# Altium PCB polishing_machine.PcbDoc
Units mm, origin at the board's own origin, x right, y up, seen from the top; angles counter-clockwise.
Board outline 82 x 85 mm, 2 copper layers (Top Layer, Bottom Layer); 29 components, 30 nets, 160 pads, 214 vias.
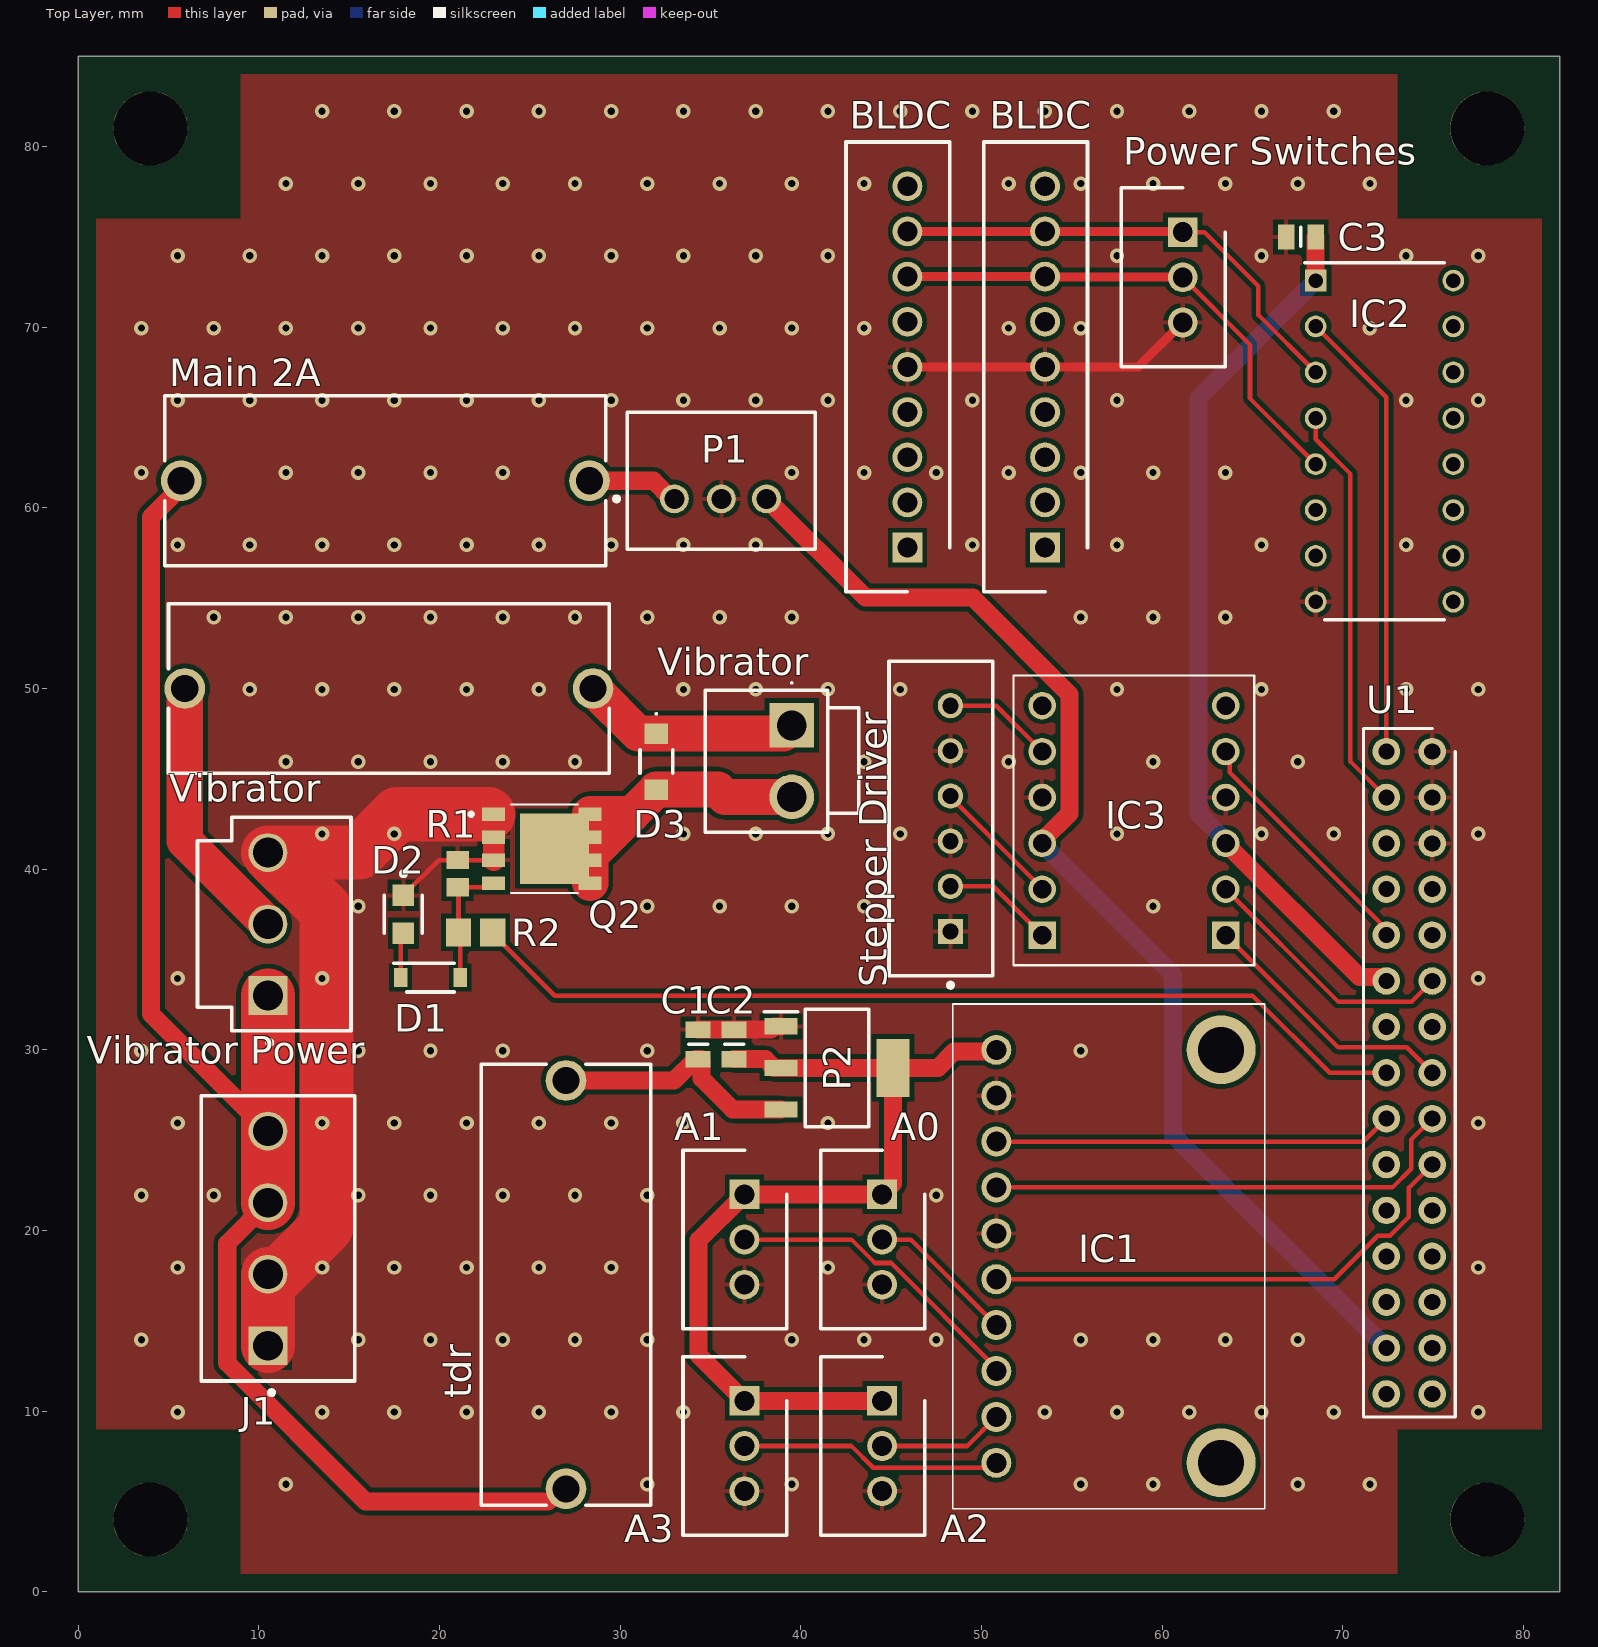
[diagram p0: Top Layer view]
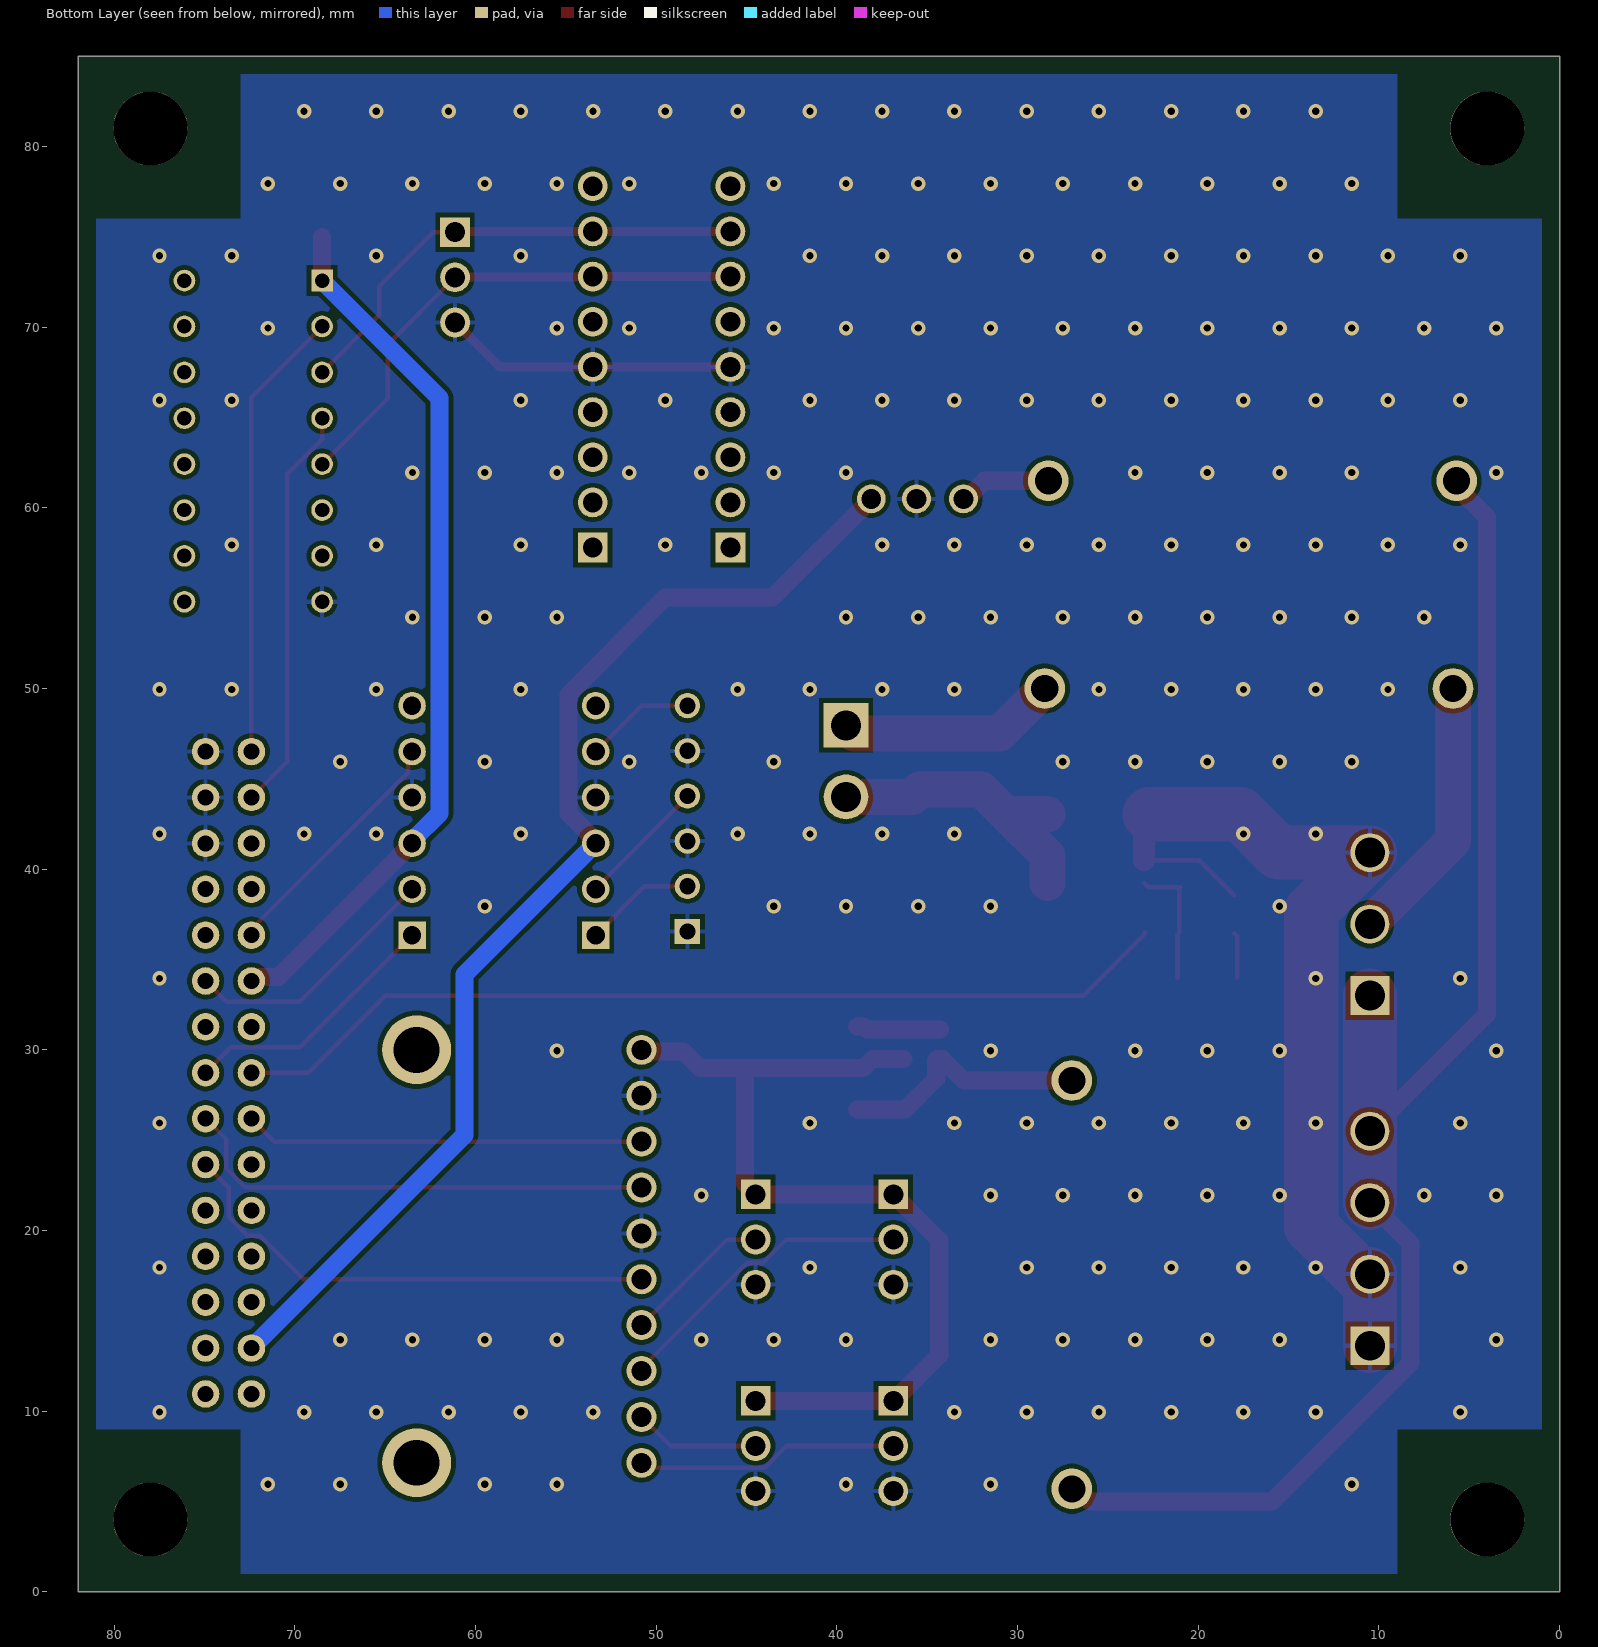
[diagram p1: Bottom Layer view, seen from below]
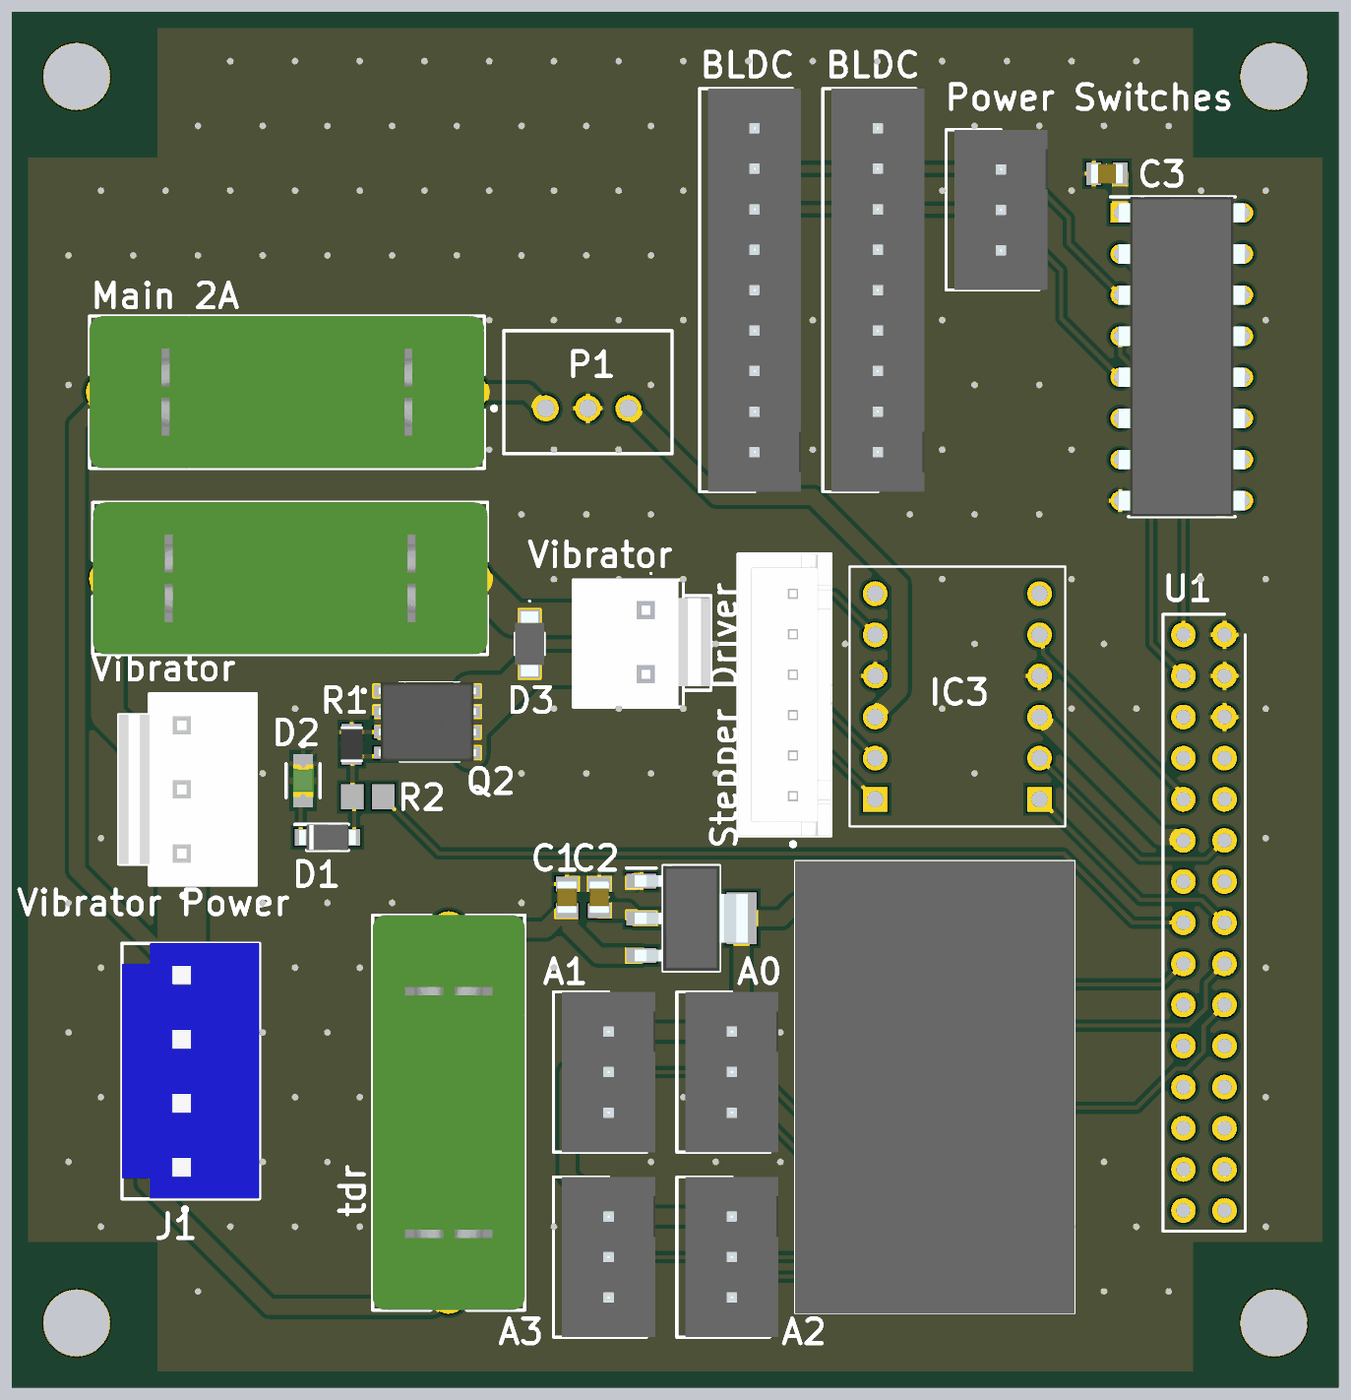
[diagram p2: 3D render of the assembled board from above, using the file's embedded part models]

## Layer stack, top to bottom
Top Solder: solder mask 0.0102, Solder Resist, Dk 3.5
Top Layer: signal copper 0.0356
Dielectric 1: dielectric 0.32, FR-4, Dk 4.8
Bottom Layer: signal copper 0.0356
Bottom Solder: solder mask 0.0102, Solder Resist, Dk 3.5

## Board outline
0,0 82,0 82,85 0,85

## Design rules (kind name [scope] priority, off if disabled: settings)
Clearance Clearance_1 [OnMid vs OnMid] p1: gap=0.25 ignorepadtopadclearanceinfootprint=FALSE sourcerule=44 cellrowname=All cellrowtype=0 cellcolname=All cellcoltype=0 innerlayers=TRUE
Clearance Clearance_2 [(ExistsOnLayer('Top Layer') Or ExistsOnLayer('Bottom Layer')) vs (ExistsOnLayer('Top Layer') Or ExistsOnLayer('Bottom Layer'))] p2: gap=0.25 ignorepadtopadclearanceinfootprint=FALSE sourcerule=44 cellrowname=All cellrowtype=0 cellcolname=All cellcoltype=0 outerlayers=TRUE
Clearance [All] p3: gap=0.254 ignorepadtopadclearanceinfootprint=FALSE ismatrix=TRUE
DiffPairsRouting [All] p1: maxlimit=0.25 minlimit=0.25 mostfreqgap=0.25 toplayer_minwidth=0.381 toplayer_maxwidth=0.381 toplayer_prefwidth=0.381 bottomlayer_minwidth=0.381 bottomlayer_maxwidth=0.381 bottomlayer_prefwidth=0.381 maxuncoupledlength=12.7
HoleSize [All] p1: absolutevalues=TRUE maxlimit=5 minlimit=0.025 maxpercent=80.000 minpercent=20.000
PolygonConnect [All] p1: connectstyle=Relief reliefconductorwidth=0.254 reliefentries=4 polygonreliefangle="90 Angle" airgapwidth=0.254
RoutingVias [All] p1: holewidth=0.711 width=1.27 viastyle="Through Hole" minholewidth=0.711 minwidth=1.27 maxholewidth=0.711 maxwidth=1.27
SolderMaskExpansion [All] p1: expansion=0.102 istentingtop=FALSE
SupplyNets "Schematic Supply Nets_5" [InNet('BLDC_0V')] p1: voltage=0.000
SupplyNets "Schematic Supply Nets_4" [InNet('+5')] p2: voltage=0.000
SupplyNets "Schematic Supply Nets_3" [InNet('+3.3')] p3: voltage=0.000
SupplyNets "Schematic Supply Nets_2" [InNet('+5_A')] p4: voltage=0.000
SupplyNets "Schematic Supply Nets_1" [InNet('+12')] p5: voltage=0.000
Width "Schematic Width Constraint_2" [InNetClass('BLDC')] p1: maxlimit=0.5 minlimit=0.25 preferedwidth=0.5 minimp=50.000000 maximp=50.000000 favimp=50.000000
Width "Schematic Width Constraint_1" [InNetClass('High Current')] p2: maxlimit=20 minlimit=0.25 preferedwidth=3 minimp=50.000000 maximp=50.000000 favimp=50.000000
Width "Schematic Width Constraint" [InNetClass('Power')] p3: maxlimit=1 minlimit=0.25 preferedwidth=1 minimp=50.000000 maximp=50.000000 favimp=50.000000
Width [All] p4: maxlimit=0.25 minlimit=0.25 preferedwidth=0.25 minimp=50.000000 maximp=50.000000 favimp=50.000000
28 further rules are at their usual default settings.

## Classes and differential pairs
net class Power: +3.3 +5 +5_A "Analog Fuse" "Main Fuse"
net class "High Current": +12 BLDC_0V "Vibrator V+" "Vibrator V-" "Vibrator VIN"
net class BLDC: BLDC_FWD BLDC_REV
component class polishing_machinie: A0 A1 A2 A3 BLDC C1 C2 C3 D1 D2 D3 IC1 IC2 IC3 J1 "Main 2A" P1 P2 "Power Switches" Q2 R1 R2 "Stepper Driver" tdr U1 Vibrator "Vibrator Power"

## Components (designator, comment, footprint, x,y, rotation, side; value= is the part's Value field where it differs from the comment)
A0 "B3B-XH-A" SHDR3W64P0X250_1X3_990X575X700P 44.5,22 r90 top
A1 "B3B-XH-A" SHDR3W64P0X250_1X3_990X575X700P 36.88,22 r90 top
A2 "B3B-XH-A" SHDR3W64P0X250_1X3_990X575X700P 44.5,10.57 r90 top
A3 "B3B-XH-A" SHDR3W64P0X250_1X3_990X575X700P 36.88,10.57 r90 top
BLDC "B9B-XH-2-C" SHDR9W64P0X250_1X9_2490X575X700P 45.9,57.8 r90 top (schematic designator "J3 Chuck BLDC")
BLDC "B9B-XH-2-C" SHDR9W64P0X250_1X9_2490X575X700P 53.52,57.8 r90 top (schematic designator "J2 Spindle BLDC")
C1 "10μF" CAPC2012X95N 34.31,30.3 r90 top
C2 "22μF" CAPC2012X95N 36.31,30.3 r90 top
C3 "0.1μF" CAPC2012X70N 67.68,75 r0 top
D1 "S-153T" SODFL3516X70N 19.5,34 r0 top
D2 "LTST-C171GKT" FP-LTST-C171GKT-MFG 18,37.5 r270 top
D3 "DSS110U" DSS110U 32,45.95 r270 top
IC1 "ADS1115" ADS1115 50.82,30 r270 top
IC2 "TC74HC4050AP_F_" DIP762W60P254L1975H445Q16N 72.31,63.69 r0 top
IC3 "BOB-12009" CONV_BOB-12009 58.44,42.7 r180 top
J1 "B4P-VH(LF)(SN)" JST-B4P-VH(LF)(SN)_V 11.95,19.56 r90 top
"Main 2A" "696108003002" 696108003002 17,61.5 r0 top (schematic designator "F1 Main 2A")
P1 "OKI-78SR-5/1.5-W36-C" MURA-OKI-78SR-3 35.6,60.5 r0 top
P2 "AZ1117IH-5.0TRG1" SOT230P700X180-4N 42,29 r0 top
"Power Switches" "B3B-XH-A" SHDR3W64P0X250_1X3_990X575X700P 61.14,75.26 r90 top (schematic designator "J7 Power Switches")
Q2 "AONS66609" AONS66609 25.67,41.135 r0 top
R1 "10k" RESC2013X60X40LL20T25_A 21,39.75 r270 top
R2 "100" RESC2013X60X40ML20T25 22,36.5 r180 top
"Stepper Driver" "B6B-XH-A_LF_SN" FP-B6B-XH-A_LF_SN-MFG 47.755,42.8 r90 top (schematic designator "J6 Stepper Driver")
tdr "696108003002" 696108003002 27,17 r90 top (schematic designator "F1 Sensor 0.2A")
U1 "M5 Core" "M5 Core" 74.95,46.51 r0 top
Vibrator "B2P-VH-B" B2PVHB 39.5,47.96 r270 top (schematic designator "J5 Vibrator")
Vibrator "696108003002" 696108003002 17.2,50 r0 top (schematic designator "F3 Vibrator")
"Vibrator Power" "B3P-VH(LF)(SN)" JST-B3P-VH(LF)(SN)-3_V 11.75,36.96 r90 top (schematic designator "J4 Vibrator Power")

## Footprints (in the part's own frame and the unit in brackets; to place one, negate y for a bottom-side part, rotate by r counter-clockwise, add the part's x,y. Pads: shape width x height; smd on the part's side, far side on the other; paste and mask are expansions set on the pad)
696108003002 [mm] "FUSEHOLDER BLOCKS - PCB - CLIP COVER - THT"
  round 2.25 hole 1.5: 1(-11.3,0) 2(11.3,0)
  silkscreen extent -12.2,-4.7 12.2,4.7, body extent -12.2,-4.7 12.2,4.7, height 11.55
ADS1115 [mm]
  round 1.665 hole 1.11: 1(0,0) 2(2.54,0) 3(5.08,0) 4(7.62,0) 5(10.16,0) 6(12.7,0) 7(15.24,0) 8(17.78,0) 9(20.32,0) 10(22.86,0)
  round 3.81 hole 2.54: MH1(0,12.446) MH2(22.86,12.446)
  silkscreen extent -2.54,-2.41 25.4,14.86, body extent -2.54,-2.41 25.4,14.86, height 3.35
AONS66609 [mm]
  rect 1.27x0.75 smd: 1(-2.67,1.905) 2(-2.67,0.635) 3(-2.67,-0.635) 4(-2.67,-1.905) 5_8(2.67,-1.905) 5_8(2.67,-0.635) 5_8(2.67,0.635) 5_8(2.67,1.905)
  rect 3.81x3.91 smd: 5_8(0.69,0)
  silkscreen extent -4.02,-2.45 2,2.45, body extent -3,-2.45 3,2.45, height 1.1
B2PVHB [mm]
  rect 2.475x2.475 hole 1.65: 1(0,0)
  round 2.475 hole 1.65: 2(3.96,0)
  silkscreen extent -2.4,-4.8 5.91,3.7, body extent -2.02,-4.82 5.83,3.68, height 10.91
CAPC2012X70N [mm]
  rect 0.91x1.39 smd: 1(-0.82,0) 2(0.82,0)
  silkscreen extent 0,-0.53 0,0.53, body extent -1,-0.63 1,0.63, height 0.7
CAPC2012X95N [mm]
  rect 0.91x1.39 smd: 1(-0.82,0) 2(0.82,0)
  silkscreen extent 0,-0.53 0,0.53, body extent -1,-0.63 1,0.63, height 0.95
CONV_BOB-12009 [mil]
  round 60 hole 40: GND_1(200,-50) GND_2(-200,-50) HV(200,50) HV2(200,150) HV3(200,-150) HV4(200,-250) LV(-200,50) LV2(-200,150) LV3(-200,-150) LV4(-200,-250)
  rect 60x60 hole 40: HV1(200,250) LV1(-200,250)
  silkscreen extent -262,-316 262,316, body extent -260,-315 260,315, height 394
DIP762W60P254L1975H445Q16N [mm]
  rect 1.2x1.2 hole 0.8: 1(-3.81,8.89)
  round 1.2 hole 0.8: 2(-3.81,6.35) 3(-3.81,3.81) 4(-3.81,1.27) 5(-3.81,-1.27) 6(-3.81,-3.81) 7(-3.81,-6.35) 8(-3.81,-8.89) 9(3.81,-8.89) 10(3.81,-6.35) 11(3.81,-3.81) 12(3.81,-1.27) 13(3.81,1.27) 14(3.81,3.81) 15(3.81,6.35) 16(3.81,8.89)
  silkscreen extent -4.41,-9.87 3.3,9.87, body extent -3.96,-9.87 3.96,9.87, height 4.45
DSS110U [mm]
  rect 1.15x1.3 smd: 1(-1.55,0) 2(1.55,0)
  silkscreen extent -2.7,-0.9 0.65,0.9, body extent -2.01,-0.9 2.01,0.9, height 1.2
FP-B6B-XH-A_LF_SN-MFG [mm]
  rect 1.4x1.4 hole 0.9 paste-2539.97 mask+0: 1(-6.25,-0.525)
  round 1.4 hole 0.9 paste-2539.97 mask+0: 2(-3.75,-0.525) 3(-1.25,-0.525) 4(1.25,-0.525) 5(3.75,-0.525) 6(6.25,-0.525)
  silkscreen extent -9.35,-2.88 8.7,2.88, body extent -8.8,-2.98 8.8,2.98, height 0.25
FP-LTST-C171GKT-MFG [mm]
  rect 1.2x1.2 smd paste+0 mask+0: 1(-1.05,0) 2(1.05,0)
  silkscreen extent -2.37,-1.05 1.05,1.05, body extent -1.75,-0.77 1.75,0.77, height 0.25
JST-B3P-VH(LF)(SN)-3_V [mm] "Connector, 3-Leads, Body 8.5x11.82mm, Pitch 3.96mm"
  rect 2.15x2.15 hole 1.65: 1(-3.96,1.25)
  round 2.15 hole 1.65: 2(0,1.25) 3(3.96,1.25)
  silkscreen extent -6.68,-3.35 5.91,5.15, body extent -5.91,-3.35 5.91,5.15, height 10.9
JST-B4P-VH(LF)(SN)_V [mm] "CONN, 4-Leads, Body 8.5x15.78mm, Pitch 3.96mm"
  rect 2.15x2.15 hole 1.65: 1(-5.94,1.45)
  round 2.15 hole 1.65: 2(-1.98,1.45) 3(1.98,1.45) 4(5.94,1.45)
  silkscreen extent -8.66,-3.35 7.89,5.15, body extent -7.89,-3.35 7.89,5.15, height 10.9
"M5 Core" [mil]
  round 60 hole 35: 1(0,0) 2(0,-100) 3(0,-200) 4(0,-300) 5(0,-400) 6(0,-500) 7(0,-600) 8(0,-700) 9(0,-800) 10(0,-900) 11(0,-1000) 12(0,-1100) 13(0,-1200) 14(0,-1300) 15(0,-1400) 16(-100,0) 17(-100,-100) 18(-100,-200) 19(-100,-300) 20(-100,-400) 21(-100,-500) 22(-100,-600) 23(-100,-700) 24(-100,-800) 25(-100,-900) 26(-100,-1000) 27(-100,-1100) 28(-100,-1200) 29(-100,-1300) 30(-100,-1400)
  silkscreen extent -150,-1450 50,50, body extent -150,-1450 50,50, height 10
MURA-OKI-78SR-3 [mm] "THMT, 3-Leads, Body 10.4x7.6mm"
  round 1.6 hole 1.1: 1(-2.6,0) 2(0,0) 3(2.5,0)
  silkscreen extent -5.92,-2.8 5.2,4.8, body extent -5.2,-2.8 5.2,4.8, height 16.5
RESC2013X60X40LL20T25_A [mm] "Chip Resistor, 2-Leads, Body 2.20x1.35mm, IPC High Density"
  rect 1x1.25 smd: 1(-0.75,0) 2(0.75,0)
  body extent -1.1,-0.67 1.1,0.67, height 0.6
RESC2013X60X40ML20T25 [mm] "Chip Resistor, 2-Leads, Body 2.00x1.25mm, IPC Low Density"
  rect 1.4x1.55 smd: 1(-0.95,0) 2(0.95,0)
  body extent -1.1,-0.72 1.1,0.72, height 0.6
SHDR3W64P0X250_1X3_990X575X700P [mm]
  rect 1.65x1.65 hole 1.1: 1(0,0)
  round 1.65 hole 1.1: 2(-2.5,0) 3(-5,0)
  silkscreen extent -7.45,-2.35 2.45,3.4, body extent -7.45,-2.88 2.45,2.88, height 7
SHDR9W64P0X250_1X9_2490X575X700P [mm]
  rect 1.65x1.65 hole 1.1: 1(0,0)
  round 1.65 hole 1.1: 2(2.5,0) 3(5,0) 4(7.5,0) 5(10,0) 6(12.5,0) 7(15,0) 8(17.5,0) 9(20,0)
  silkscreen extent -2.45,-2.35 22.45,3.4, body extent -2.45,-2.88 22.45,2.88, height 7
SODFL3516X70N [mm]
  rect 0.74x1.04 smd: 1(-1.65,0) 2(1.65,0)
  silkscreen extent -2.02,-0.8 1.3,0.8, body extent -1.75,-0.8 1.75,0.8, height 0.7
SOT230P700X180-4N [mm]
  rect 1.85x0.9 smd: 1(-3.1,2.3) 2(-3.1,0) 3(-3.1,-2.3)
  rect 1.85x3.2 smd: 4(3.1,0)
  silkscreen extent -4.03,-3.25 1.75,3.25, body extent -3.5,-3.25 3.5,3.25, height 1.8

## Part data
A0 A1 A2 A3 BLDC BLDC "Power Switches" Vibrator: "Connector", Manufacturer_Name="JST (JAPAN SOLDERLESS TERMINALS)"
  A0 A1 A2 A3 "Power Switches": Datasheet Link=http://www.jst-mfg.com/product/pdf/eng/eXH.pdf, Height=7mm, Manufacturer_Part_Number=B3B-XH-A
  BLDC BLDC: Height=7mm, Manufacturer_Part_Number=B9B-XH-2-C
  Vibrator: Datasheet Link=https://www.jst-mfg.com/product/pdf/eng/eVH.pdf, Height=10.9mm, Manufacturer_Part_Number=B2P-VH-B
C1: library part GRM219B31C106KA73D, "Capacitor", Manufacturer_Name="Murata Electronics", Mouser Part Number=N/A, Datasheet Link=http://www.murata.com/~/media/webrenewal/support/library/catalog/products/capacitor/mlcc/c02e.pdf, Height=0.95mm, Manufacturer_Part_Number=GRM219B31C106KA73D, Mouser Price/Stock=https://www.mouser.com/Search/Refine.aspx?Keyword=N%2FA
C2: library part GRM219B31A226MEA0D, "Capacitor", Manufacturer_Name="Murata Electronics", Datasheet Link=http://www.murata.com/~/media/webrenewal/support/library/catalog/products/capacitor/mlcc/c02e.pdf, Height=0.95mm, Manufacturer_Part_Number=GRM219B31A226MEA0D
C3: library part GRM216F51E104ZA01D, "Capacitor", Manufacturer_Name="Murata Electronics", Mouser Part Number=81-GRM40Y104Z25D, Datasheet Link=http://www.murata.com/~/media/webrenewal/support/library/catalog/products/capacitor/mlcc/c02e.pdf, Height=0.7mm, Manufacturer_Part_Number=GRM216F51E104ZA01D, Mouser Price/Stock=https://www.mouser.co.uk/ProductDetail/Murata-Electronics/GRM216F51E104ZA01D?qs=duOfYTBEatk23Zc3Fu%2FfWg%3D%3D
D1: "Diode", Manufacturer_Name=Semitec, Mouser Part Number=954-S-153T, Datasheet Link=https://componentsearchengine.com/Datasheets/1/S-153T.pdf, Height=0.7mm, Manufacturer_Part_Number=S-153T, Mouser Price/Stock=https://www.mouser.co.uk/ProductDetail/Semitec/S-153T?qs=wgO0AD0o1vvtOOXMab9S0Q%3D%3D
D2: library part CMP-22017-000007-1, "LED GREEN CLEAR CHIP SMD", Case Code (Imperial)=0805, Case Code (Metric)=2012, Color=Green, Forward Current=30mA, Forward Voltage=2.1V, Lens Color=Colorless, Max Operating Temperature=85°C, Min Operating Temperature=-55°C, Package Quantity=1, Power Dissipation=100mW, Reverse Voltage=5V, Test Current=10mA, Case/Package=0805, Depth=1.25mm, Dominant Wavelength=569nm, Height=0.8mm, Illumination Color=Green, Lead Free="Lead Free", Length=2mm, Lens Style=Diffused, Lens Transparency=Clear, Luminous Intensity=12mcd, Mount="Surface Mount", Number of Elements=1, Number of LEDs=1, Number of Pins=2, Packaging="Tape and Reel", Power Rating=100mW, Radiation Hardening=No, Viewing Angle=130°, Wavelength=585nm, Width=1.25mm
D3: "Schottky Diode", Manufacturer_Name="SANGDEST MICROELECTRONICS (NANJING) CO LTD", Datasheet Link=https://www.smc-diodes.com/propdf/DSS12U%20THRU%20DSS120U%20N1873%20REV.D.pdf, Height=1.1mm, Manufacturer_Part_Number=DSS110U
IC1: "Integrated Circuit", Manufacturer_Name=Adafruit, Datasheet Link=https://cdn-learn.adafruit.com/downloads/pdf/adafruit-4-channel-adc-breakouts.pdf, Height=3.25mm, Manufacturer_Part_Number=ADS1115
IC2: "Integrated Circuit", Manufacturer_Name=Toshiba, Manufacturer_Part_Number=TC74HC4050AP(F), Mouser Part Number=757-TC74HC4050APF, Datasheet Link=http://toshiba.semicon-storage.com/ap-en/product/logic/cmos-logic/detail.TC74HC4050AP.html, Height=4.45mm, Mouser Price/Stock=https://www.mouser.co.uk/ProductDetail/Toshiba/TC74HC4050APF?qs=6sMpW4eYgwPJdB5%252B3R4%2FxA%3D%3D
IC3: "BSS138 Logic-Level Translator Interface Evaluation Board", Package=None, Availability=Unavailable, MF=SparkFun, MP=BOB-12009, Price=None, SnapEDA_Link=https://www.snapeda.com/parts/BOB-12009/SparkFun%20Electronics/view-part/551764/?ref=snap
J1: library part CMP-2000-05905-1, "Male Header, Pitch 3.96 mm, 1 x 4 Position, Height 10.9 mm, Tail Length 3.7 mm, -25 to 85 degC, RoHS, Bulk", Manufacturer=JST, Package Description="Male Header, Pitch 3.96 mm, 1 x 4 Position, Height 10.9 mm, Tail Length 3.7 mm", Datasheet URL=http://www.jst-mfg.com/product/pdf/eng/eVH.pdf, Datasheet Version=05/2016, Manufacturer URL=http://www.jst.com/home2.html, Mounting Technology=ThroughHole, No of Positions=4, Package Reference=B4P-VH(LF)(SN), Pitch=3.96mm, Style/Orientation=StraightHeader/Plug, Termination=Solder, Type=LockingHeader
"Main 2A" tdr Vibrator: library part CMP-1502-00237-2, Fuse Current=10A, Voltage Rating (AC)=250V, Mount="Through Hole", NexarPartId=56808807, Packaging=Box, REACH SVHC=Unknown, RoHS=Non-Compliant
P1: library part CMP-2000-05274-1, "Non-Isolated DC/DC Converter, 7.5 W, 7 to 36 V, 1.5 A, -40 to 85 degC, 3-Pin THD, RoHS", Current - Output (Max)=1.5A, Manufacturer=Murata, Operating Temperature=-40degC~85degC, Package / Case=3-SIPModule, Power (Watts) - Manufacture Series=8W, Voltage - Input (Max)=36V, Voltage - Input (Min)=7V, Voltage - Isolation=-, Voltage - Output 1=5V, Applications=ITE(Commercial), Category=PowerSupplies-BoardMount, Datasheet URL=https://datasheet.ciiva.com/8006/1790439-8006672.pdf, Datasheet Version=Oct-13, Efficiency=90.5%, Family=DCDCConverters, Features=SCP, Manufacturer URL=http://www.murata.com/, Mounting Type=ThroughHole, Number of Outputs=1, Packaging=Tube, Power (Watts) - Max=8W, Series=Okami™OKI-78SR, Size / Dimension="0.41\"Lx0.30\"Wx0.65\"H(10.4mmx7.6mmx16.5mm)", Type=LinearRegulatorReplacement, Voltage - Output 2=-, Voltage - Output 3=-
P2: "Integrated Circuit", Manufacturer_Name="Diodes Incorporated", Mouser Part Number=621-AZ1117IH-5.0TRG1, Arrow Part Number=AZ1117IH-5.0TRG1, Arrow Price/Stock=https://www.arrow.com/en/products/az1117ih-5.0trg1/diodes-incorporated?utm_currency=USD&region=europe, Datasheet Link=https://www.diodes.com//assets/Datasheets/AZ1117I.pdf, Height=1.8mm, Manufacturer_Part_Number=AZ1117IH-5.0TRG1, Mouser Price/Stock=https://www.mouser.co.uk/ProductDetail/Diodes-Incorporated/AZ1117IH-5.0TRG1?qs=cpo3%2FpBou2jpUVbxjr50ag%3D%3D
Q2: "N-Channel 60 V 10A (Ta), 51A (Tc) 3.1W (Ta), 83W (Tc) Surface Mount 8-PDFN (5.2x5.75)", Package="PDFN56 Taiwan Semiconductor", Check_prices=https://www.snapeda.com/parts/TSM130NB06LCR/Taiwan+Semiconductor/view-part/?ref=eda, MF="Taiwan Semiconductor", MP=TSM130NB06LCR, SnapEDA_Link=https://www.snapeda.com/parts/TSM130NB06LCR/Taiwan+Semiconductor/view-part/?ref=snap
R1: library part CMP-2001-00582-2, "Metal Film Chip Resistor, High Reliability Type, 0.125 W, +/- 0.1%, -55 to 155 degC, 0805 (2012 Metric), RoHS, Tape and Reel", Case Code - in=0805, Case Code - mm=2012, Manufacturer=Panasonic, Operating Temperature Range=-55Cto+155C, Package / Case=0805(2012metric), Package Description="2-Pin Surface Mount Device, Body 2 x 1.25 mm", Power Rating=125mW(1/8W), Resistance=10kOhms, Temperature Coefficient=25PPM/C, Tolerance=0.1%, Voltage Rating=100V, Brand=Panasonic, Datasheet URL=https://industrial.panasonic.com/cdbs/www-data/pdf/RDM0000/AOA0000C307.pdf, Datasheet Version=02/2016, Factory Pack Quantity=5000, Height=0.5mm, Length=2mm, Manufacturer URL=http://www.panasonic.com/, Mounting Technology=SurfaceMount, Package Reference=0805, Packaging=Reel, Product=ThinFilmResistorsSMD, Product Category=ThinFilmResistors-SMD, RoHS=Details, Series=ERA-6A, Termination Style=SMD/SMT, Type=MetalFilmChipResistors, Width=1.25mm
R2: library part CMP-2001-00580-1, Manufacturer=Panasonic, Part Number=ERA6AEB101V
"Vibrator Power": library part CMP-1755-00003-1, "Male Header, Pitch 3.96 mm, 1 x 3 Position, Height 10.9 mm, Tail Length 3.7 mm, -25 to 85 degC, RoHS, Bulk", ComponentLink1Description="Manufacturer URL", ComponentLink1URL=http://www.jst.com/home2.html, ComponentLink2Description=Datasheet, ComponentLink2URL=http://www.jst-mfg.com/product/pdf/eng/eVH.pdf, DatasheetVersion=May-16, PackageDescription="Male Header, Pitch 3.96 mm, 1 x 3 Position, Height 10.9 mm, Tail Length 3.7 mm", PackageReference=B3P-VH(LF)(SN)

## Free pads (board coordinates)
  round 4.1 hole 4.1: ""(4,4) ""(4,81) ""(78,4) ""(78,81)

## Via types
v1: diameter 0.8, hole 0.4, Top Layer to Bottom Layer, tented both sides, 214 vias

## Nets (pads, with @x,y where several pads share a name; then routed paths per layer and width w, separated by ;. In a path a pad name is that pad's centre, name@x,y a point inside that pad or via, vN(x,y) a via of type N, cw(c..) or ccw(c..) an arc to the next point about the centre after c; other vN are vias at no path point)
+3.3: C3.2 IC2.1 IC3.LV U1.21 | length 48.9
  Top Layer w1: IC3.LV 70.928,34.022 72.198,34.022 U1.21 ; IC2.1 C3.2
  Bottom Layer w1: IC3.LV 63.52,41.572 62.008,43.084 62.008,66.088 IC2.1
+5: IC3.HV P1.3 U1.29 | length 66
  Top Layer w1: P1.3 43.569,55.031 49.518,55.031 54.872,49.676 54.872,43.084 53.36,41.572 IC3.HV
  Bottom Layer w1: IC3.HV 60.611,34.179 60.611,25.289 U1.29
+5_A: A0.1 A1.1 A2.1 A3.1 C2.1 IC1.1 P2.2 P2.4 | length 51.1
  Top Layer w1: C2.1 38.045,29.48 38.525,29 P2.2 P2.4 ; A2.1 A3.1 34.34,13.11 34.34,19.46 A1.1 A0.1 45.1,22.6 P2.4 ; IC1.1 50.725,29.905 48.488,29.905 47.583,29 P2.4
+12: "Main 2A.1" "Vibrator Power.1" J1.3 J1.4 tdr.1 | length 81.6
  Top Layer w1: 5.7,61.5 5.7,61.162 4.025,59.487 4.025,31.975 J1.4 ; J1.3 8.25,19.29 8.25,12.659 15.909,5 26,5
  Top Layer w3: J1.3 J1.4 10.5,33
A0: A0.2 IC1.7 | length 8.3
  Top Layer w0.25: A0.2 44.503,19.497 46.083,19.497 IC1.7
A1: A1.2 IC1.8 | length 17
  Top Layer w0.25: A1.2 42.803,19.5 44.103,18.2 44.997,18.2 50.82,12.377 IC1.8
A2: A2.2 IC1.9 | length 7
  Top Layer w0.25: A2.2 49.21,8.07 IC1.9
A3: A3.2 IC1.10 | length 14.6
  Top Layer w0.25: A3.2 36.95,8 37,8 37.07,8.07 42.803,8.07 44.003,6.87 50.55,6.87 IC1.10
ADC_ALRT: IC1.6 U1.10 | length 27.7
  Top Layer w0.25: IC1.6 69.532,17.3 71.939,19.707 72.615,19.707 73.661,20.753 73.661,22.361 U1.10
ADC_SCL: IC1.3 U1.24 | length 22.1
  Top Layer w0.25: IC1.3 71.14,24.92 U1.24
ADC_SDA: IC1.4 U1.9 | length 26.7
  Top Layer w0.25: IC1.4 72.748,22.38 73.794,23.426 73.794,25.034 U1.9
"Analog Fuse": C1.1 P2.3 tdr.2 | length 14.1
  Top Layer w1: tdr.2 32.98,28.3 34.16,29.48 C1.1 34.46,29.48 34.505,29.435 34.505,28.425 36.23,26.7 P2.3
BLDC_0V: "Power Switches.3" "Stepper Driver.1" "Stepper Driver.3" "Stepper Driver.5" "Vibrator Power.3" A0.3 A1.3 A2.3 A3.3 BLDC.5 C1.2 C2.2 C3.1 D2.1 IC1.2 IC1.5 IC2.8 IC3.GND_1 IC3.GND_2 J1.1 J1.2 P1.2 P2.1 Q2.1 Q2.2 Q2.3 R1.1 U1.1 U1.2 U1.3 | length 71.3
  Top Layer w0.25: D2.1 19.95,40.5 R1.1 Q2.3
  Top Layer w0.5: BLDC.5@45.9,67.8 53.52,67.8 58.68,67.8 61.14,70.26
  Top Layer w1: C1.2 C2.2 38.345,31.12 38.525,31.3 P2.1
  Top Layer w1.2: Q2.3 Q2.2
  Top Layer w3: J1.1 J1.2 ; J1.2@10.818,17.262 13.75,20.194 13.75,37.705 11.67,39.785 11.635,39.785 10.5,40.92 15.542,40.92 17.662,43.04 Q2.1@22.705,43.04
  other v1: 11.5,5.95 31.5,5.95 39.5,5.95 55.5,5.95 59.5,5.95 67.5,5.95 71.5,5.95 5.5,9.95 13.5,9.95 17.5,9.95 21.5,9.95 25.5,9.95 29.5,9.95 33.5,9.95 53.5,9.95 57.5,9.95 61.5,9.95 65.5,9.95 69.5,9.95 77.5,9.95 3.5,13.95 15.5,13.95 19.5,13.95 23.5,13.95 27.5,13.95 31.5,13.95 39.5,13.95 43.5,13.95 47.5,13.95 55.5,13.95 59.5,13.95 63.5,13.95 67.5,13.95 5.5,17.95 13.5,17.95 17.5,17.95 21.5,17.95 25.5,17.95 29.5,17.95 41.5,17.95 77.5,17.95 3.5,21.95 7.5,21.95 15.5,21.95 19.5,21.95 23.5,21.95 27.5,21.95 31.5,21.95 47.5,21.95 5.5,25.95 13.5,25.95 17.5,25.95 21.5,25.95 25.5,25.95 29.5,25.95 33.5,25.95 41.5,25.95 77.5,25.95 3.5,29.95 15.5,29.95 19.5,29.95 23.5,29.95 31.5,29.95 55.5,29.95 5.5,33.95 13.5,33.95 77.5,33.95 15.5,37.95 31.5,37.95 35.5,37.95 39.5,37.95 43.5,37.95 59.5,37.95 13.5,41.95 17.5,41.95 33.5,41.95 37.5,41.95 41.5,41.95 45.5,41.95 57.5,41.95 65.5,41.95 69.5,41.95 77.5,41.95 11.5,45.95 15.5,45.95 19.5,45.95 23.5,45.95 27.5,45.95 43.5,45.95 51.5,45.95 59.5,45.95 67.5,45.95 9.5,49.95 13.5,49.95 17.5,49.95 21.5,49.95 25.5,49.95 33.5,49.95 37.5,49.95 41.5,49.95 45.5,49.95 57.5,49.95 65.5,49.95 73.5,49.95 77.5,49.95 7.5,53.95 11.5,53.95 15.5,53.95 19.5,53.95 23.5,53.95 27.5,53.95 31.5,53.95 35.5,53.95 39.5,53.95 55.5,53.95 59.5,53.95 63.5,53.95 5.5,57.95 9.5,57.95 13.5,57.95 17.5,57.95 21.5,57.95 25.5,57.95 29.5,57.95 33.5,57.95 37.5,57.95 49.5,57.95 57.5,57.95 65.5,57.95 73.5,57.95 3.5,61.95 11.5,61.95 15.5,61.95 19.5,61.95 23.5,61.95 39.5,61.95 43.5,61.95 47.5,61.95 51.5,61.95 55.5,61.95 59.5,61.95 63.5,61.95 5.5,65.95 9.5,65.95 13.5,65.95 17.5,65.95 21.5,65.95 25.5,65.95 29.5,65.95 33.5,65.95 37.5,65.95 41.5,65.95 49.5,65.95 57.5,65.95 73.5,65.95 77.5,65.95 3.5,69.95 7.5,69.95 11.5,69.95 15.5,69.95 19.5,69.95 23.5,69.95 27.5,69.95 31.5,69.95 35.5,69.95 39.5,69.95 43.5,69.95 51.5,69.95 55.5,69.95 71.5,69.95 5.5,73.95 9.5,73.95 13.5,73.95 17.5,73.95 21.5,73.95 25.5,73.95 29.5,73.95 33.5,73.95 37.5,73.95 41.5,73.95 57.5,73.95 65.5,73.95 73.5,73.95 77.5,73.95 11.5,77.95 15.5,77.95 19.5,77.95 23.5,77.95 27.5,77.95 31.5,77.95 35.5,77.95 39.5,77.95 43.5,77.95 51.5,77.95 55.5,77.95 59.5,77.95 63.5,77.95 67.5,77.95 71.5,77.95 13.5,81.95 17.5,81.95 21.5,81.95 25.5,81.95 29.5,81.95 33.5,81.95 37.5,81.95 41.5,81.95 45.5,81.95 49.5,81.95 53.5,81.95 57.5,81.95 61.5,81.95 65.5,81.95 69.5,81.95
BLDC_FWD: "Power Switches.1" BLDC.8 IC2.3 | length 26.8
  Top Layer w0.25: 61.14,75.26 62.34,75.26 65.329,72.271 65.329,70.671 IC2.3
  Top Layer w0.5: BLDC.8@45.9,75.3 61.1,75.3 61.14,75.26
BLDC_FWD_B: IC2.2 U1.16 | length 25.1
  Top Layer w0.25: IC2.2 72.41,66.13 U1.16
BLDC_REV: "Power Switches.2" BLDC.7 IC2.5 | length 28.6
  Top Layer w0.25: 61.14,72.76 64.863,69.037 64.863,66.057 IC2.5
  Top Layer w0.5: BLDC.7@45.9,72.8 53.5,72.8 53.52,72.78 61.12,72.78 61.14,72.76
BLDC_REV_B: IC2.4 U1.17 | length 22.6
  Top Layer w0.25: IC2.4 68.5,63.799 70.424,61.875 70.424,45.956 U1.17
"Main Fuse": "Main 2A.2" P1.1 | length 5.1
  Top Layer w1: 28.3,61.5 31.838,61.5 32.838,60.5 P1.1
NetD1_1: D1.1 D2.2 | length 2.5
  Top Layer w0.25: D1.1 17.85,36.3 D2.2
NetD1_2: D1.2 Q2.4 R1.2 R2.2 | length 7.2
  Top Layer w0.25: D1.2 21.15,36.4 R2.2 21.05,38.95 R1.2 22.77,39 Q2.4
NetIC3_HV1: "Stepper Driver.2" IC3.HV1 | length 6.2
  Top Layer w0.25: 48.28,39.05 50.66,39.05 IC3.HV1
NetIC3_HV2: "Stepper Driver.4" IC3.HV2 | length 7.3
  Top Layer w0.25: 48.28,44.05 48.28,44.01 53.36,38.93 IC3.HV2
NetIC3_HV3: "Stepper Driver.6" IC3.HV3 | length 6.1
  Top Layer w0.25: 48.28,49.05 50.82,49.05 IC3.HV3
Stepper_DIR_LV: IC3.LV2 U1.6 | length 14.5
  Top Layer w0.25: IC3.LV2 69.737,32.673 73.813,32.673 U1.6
Stepper_ENA_LV: IC3.LV1 U1.8 | length 14.6
  Top Layer w0.25: IC3.LV1 69.737,30.133 73.547,30.133 U1.8
Stepper_PULSE_LV: IC3.LV3 U1.20 | length 13.8
  Top Layer w0.25: IC3.LV3 63.732,46.298 63.732,45.366 72.41,36.688 U1.20
"Vibrator EN": R2.1 U1.23 | length 52.7
  Top Layer w0.25: R2.1 22.95,36.425 26.375,33 65,33 69.27,28.73 U1.23
"Vibrator V+": D3.1 Vibrator.1@39.5,47.96 Vibrator.2@28.5,50 | length 12.2
  Top Layer w2: Vibrator.2@28.5,50 31,47.5 D3.1 39.04,47.5 Vibrator.1@39.5,47.96
"Vibrator V-": D3.2 Q2.5_8 Vibrator.2@39.5,44 | length 16.7
  Top Layer w2: Q2.5_8@28.34,39.23 28.34,40.5 28.34,40.74 30.64,43.04 ; Q2.5_8@28.34,43.04 30.64,43.04 ; Vibrator.2@39.5,44 35.818,44 35.418,44.4 D3.2 30.64,43.04
"Vibrator VIN": "Vibrator Power.2" Vibrator.1@5.9,50 | length 14.9
  Top Layer w2: Vibrator.1@5.9,50 5.9,41.56 10.5,36.96
pads on no net: BLDC.1 BLDC.2 BLDC.3 BLDC.4 BLDC.6 BLDC.9 IC1.MH1 IC1.MH2 IC2.6 IC2.7 IC2.9 IC2.10 IC2.11 IC2.12 IC2.13 IC2.14 IC2.15 IC2.16 IC3.HV4 IC3.LV4 U1.4 U1.5 U1.7 U1.11 U1.12 U1.13 U1.14 U1.15 U1.18 U1.19 U1.22 U1.25 U1.26 U1.27 U1.28 U1.30

## Polygon pours and split planes (outlines as drawn)
BLDC_0V on Top Layer "NONET_L-01_P-001" (solid, pour order 0): 9,76 9,84 73,84 73,76 81,76 81,9 73,9 73,1 9,1 9,9 1,9 1,76
BLDC_0V on Bottom Layer "NONET_L-01_P-001" (solid, pour order 1): 9,76 9,84 73,84 73,76 81,76 81,9 73,9 73,1 9,1 9,9 1,9 1,76